# EAGLE board Sch (EAGLE 6.4)
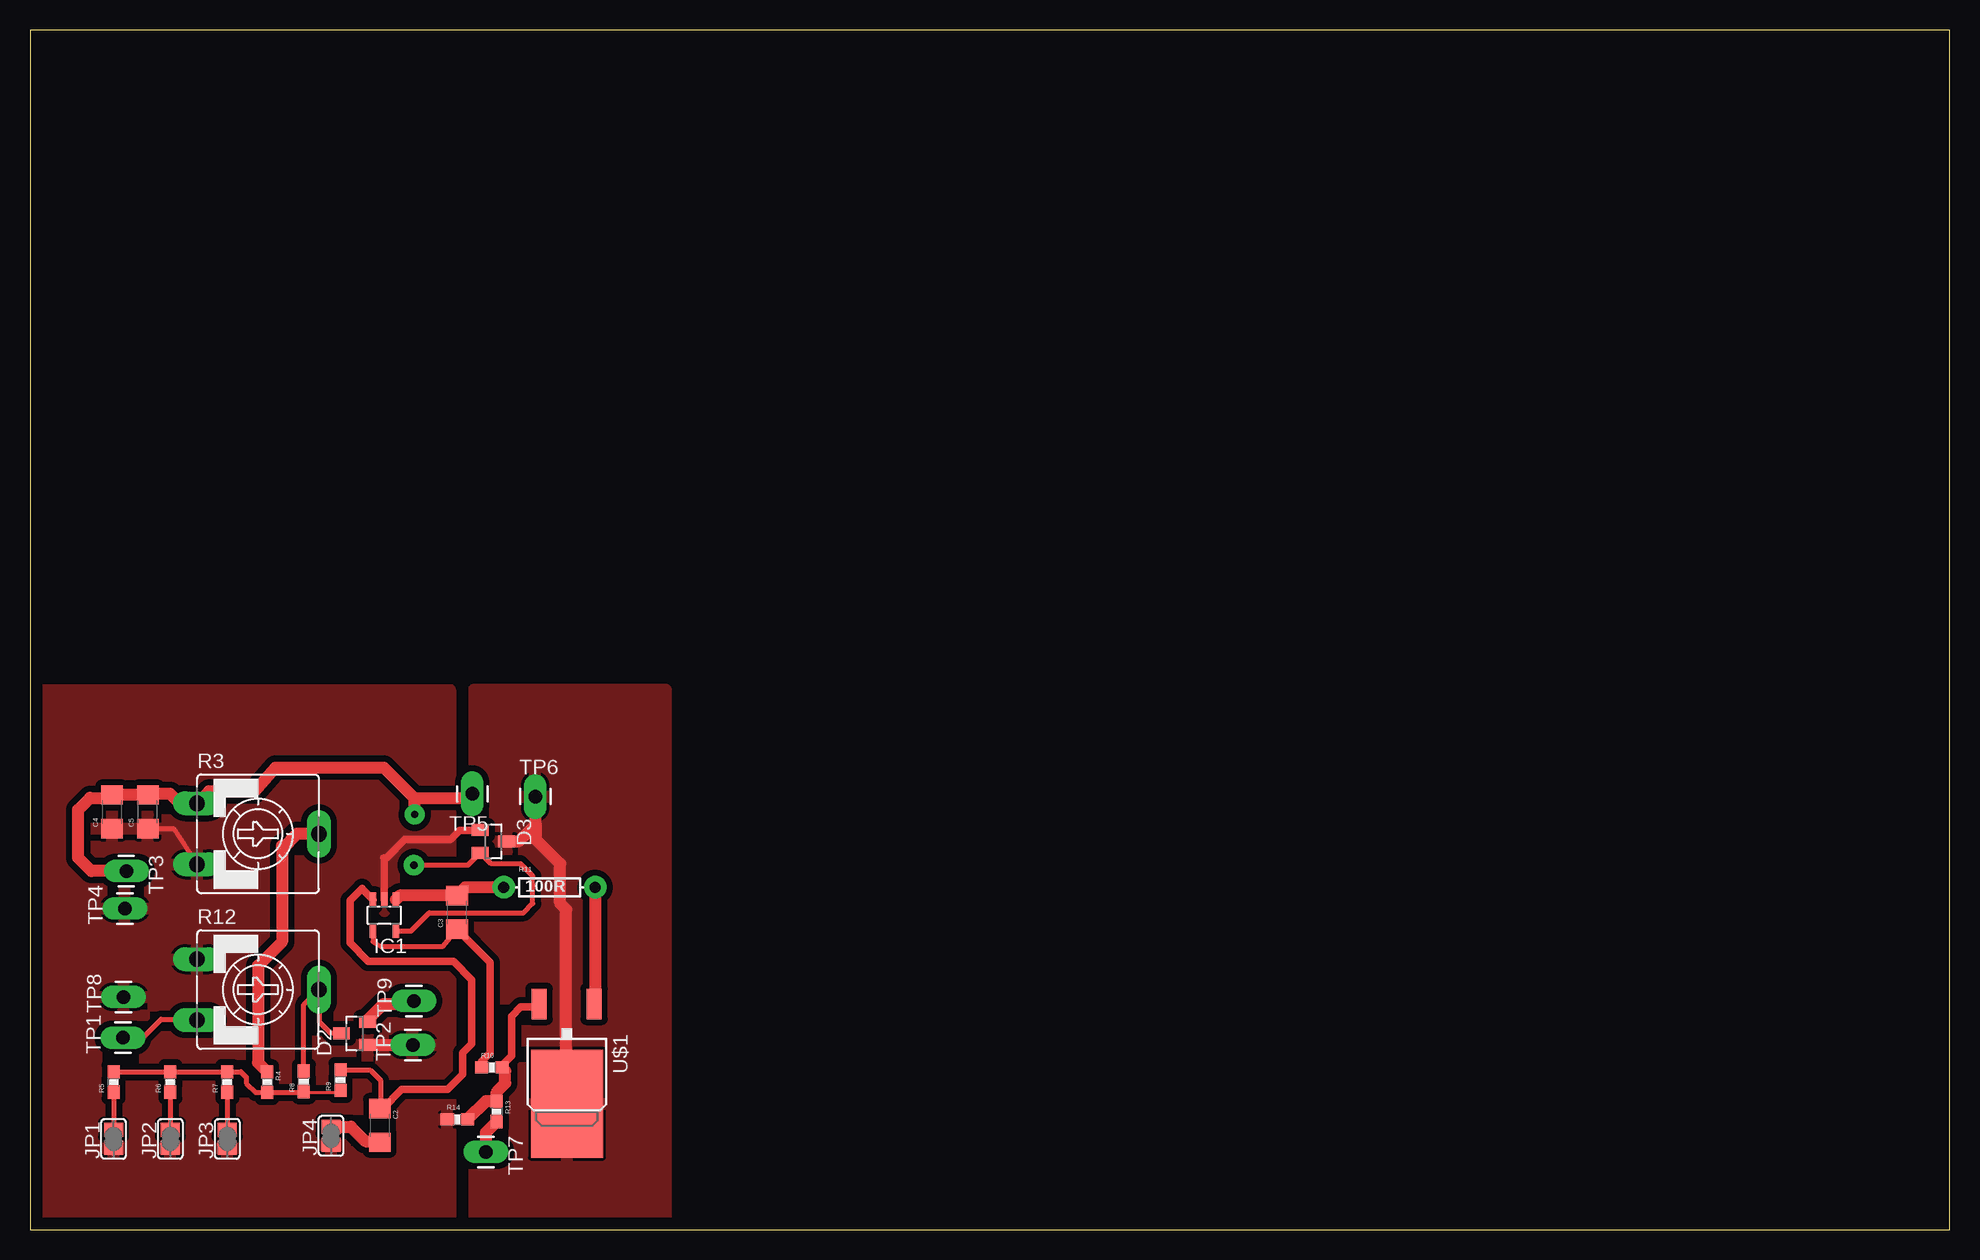
[diagram p0: board, top side]
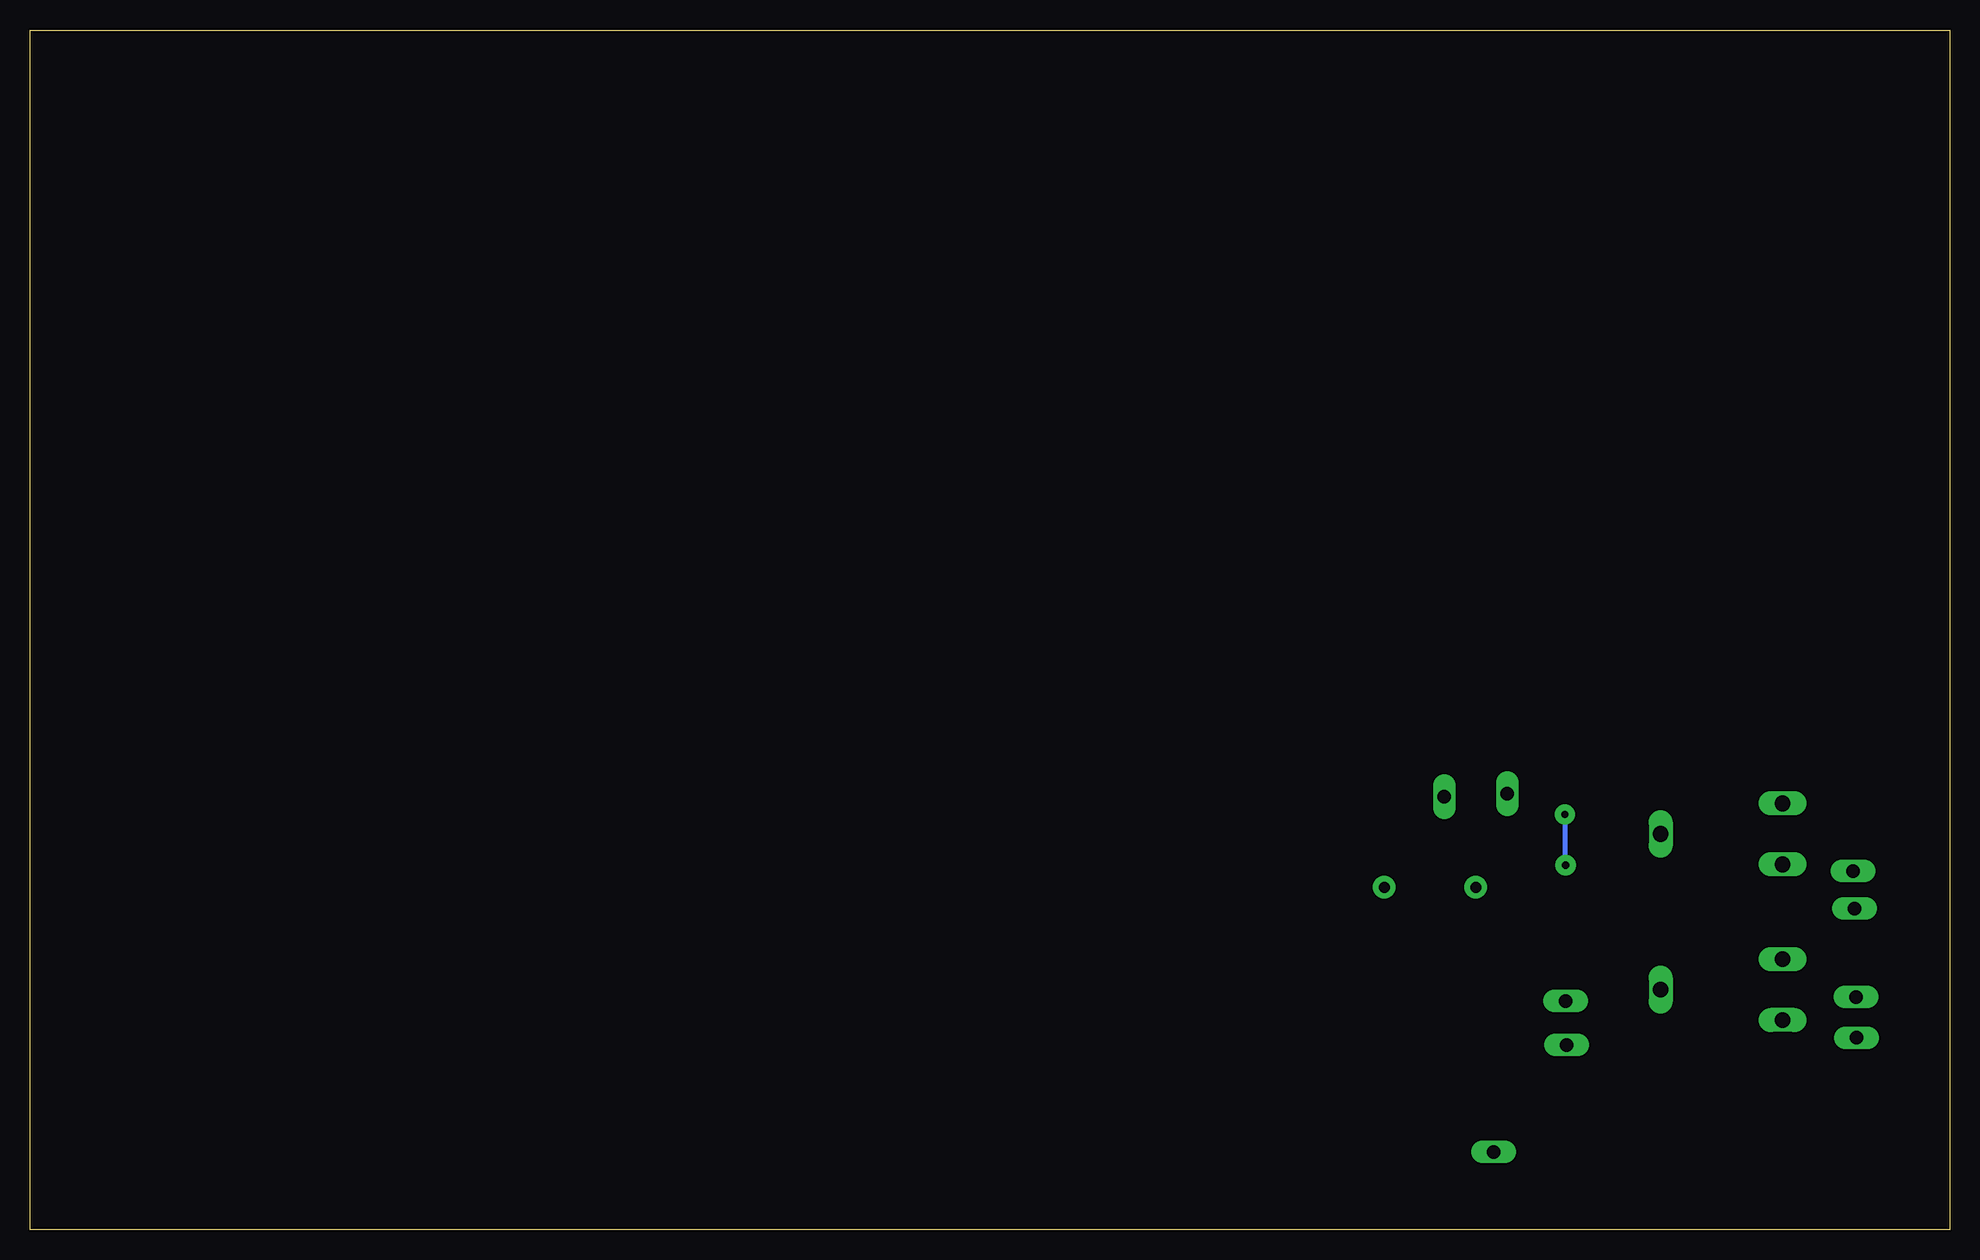
[diagram p1: board, bottom side, seen from below]

Size 160 x 100 mm. Coordinates in mm from the lower left corner, seen from the top.
Outline: 0,0 160,0 160,100 0,100 0,0
Copper layers (1*16): Top 0.035mm / dielectric 1.5mm / Bottom 0.035mm
Design rules "default": minimum track width 10mil, minimum drill 24mil, track to track 8mil, track to pad 8mil, pad to pad 8mil, via to via 8mil, smd to smd 8mil, copper to edge 40mil, drill to drill 8mil, minimum pad ring 10mil, minimum via ring 8mil, stop-mask expansion 4mil, vias tented up to drill 0mil, thermal gap 10mil
Net classes: 0 default: clearance 0.508 mm

## Footprints (pad centres in the part's own frame; a part is rotated, then mirrored left to right if it is on the bottom)
1206 = smd 1.6 x 1.8: 1 -1.4,0; 2 1.4,0
SOT23 = smd 1 x 1.4: 1 -0.95,-1.1; 2 0.95,-1.1; 3 0,1.1
SOT23-5 = smd 0.55 x 1.2: 1 -0.95,-1.3; 2 0,-1.3; 3 0.95,-1.3; 4 0.95,1.3; 5 -0.95,1.3
SJ = smd 1.168 x 1.6: 1 -0.762,0; 2 0.762,0
CA9V = drill 1.321 long: A -2.54,-5.08; E 2.54,-5.08; S 0,5.08
0603-RES = smd 1.1 x 1: 1 -0.85,0; 2 0.85,0
AXIAL-0.3 = drill 0.9 pad 1.88: P$1 -3.81,0; P$2 3.81,0
1X01_LONGPAD = drill 1.118 pad 1.88 long: 1 0,0
TO252AA-LARGE = smd 1.27 x 2.54: P$1 -2.261,-6.325; P$2 2.311,-6.325 | smd 6 x 9: P$3 0,2

## Placement (x,y rotation side)
C2  470p  [1206]  29.16,8.68 270 top
C3  470p  [1206]  35.6,26.44 90 top
C4  100n  [1206]  6.84,34.82 90 top
C5  47u  [1206]  9.82,34.82 90 top
D2  BAV199  [SOT23]  27.05,16.35 90 top
D3  BAV99  [SOT23]  38.63,32.36 270 top
IC1  LMH6645MF  [SOT23-5]  29.53,26.19 180 top
JP1  [SJ]  6.97,7.56 90 top
JP2  [SJ]  11.7,7.56 90 top
JP3  [SJ]  16.44,7.56 90 top
JP4  [SJ]  25.09,7.81 90 top
R3  10K  [CA9V]  19,32.98 270 top
R4  [0603-RES]  19.77,12.29 270 top
R5  2K7  [0603-RES]  6.97,12.3 90 top
R6  1K2  [0603-RES]  11.7,12.3 90 top
R7  470R  [0603-RES]  16.44,12.3 90 top
R8  10K  [0603-RES]  22.83,12.35 90 top
R9  10K  [0603-RES]  25.88,12.46 90 top
R10  1K  [0603-RES]  38.49,13.51 0 top
R11  100R  [AXIAL-0.3]  43.3,28.53 0 top
R12  10K  [CA9V]  19,20 270 top
R13  1K  [0603-RES]  38.91,9.85 270 top
R14  1R  [0603-RES]  35.64,9.18 0 top
TP1  Analogue / TTL Drive  [1X01_LONGPAD]  7.75,15.98 90 top
TP2  GND  [1X01_LONGPAD]  31.91,15.38 90 top
TP3  VCC  [1X01_LONGPAD]  8.03,29.88 270 top
TP4  GND  [1X01_LONGPAD]  7.91,26.76 90 top
TP5  LDA  [1X01_LONGPAD]  36.87,36.32 180 top
TP6  LDC  [1X01_LONGPAD]  42.12,36.1 0 top
TP7  MON  [1X01_LONGPAD]  38,6.47 270 top
TP8  GND  [1X01_LONGPAD]  7.8,19.39 90 top
TP9  +5v  [1X01_LONGPAD]  32,19.05 90 top
U$1  IRLR3105  [TO252AA-LARGE]  44.75,12.48 180 top

## Library data of the parts
C2-C5 R4-R11 R13 R14 = SparkFun-Passives
D2 D3 = diode
IC1 = analog-devices; MF: ALTERA CORPORATION; MPN: AD8067ARTZ-REEL7; OC_FARNELL: 1464848; OC_NEWARK: 59K6326
JP1-JP4 = jumper
R3 R12 = pot
TP1-TP9 = SparkFun-Connectors
U$1 = transistor-power

## Nets
+5V: D2.2 TP9.1
GNDA: C4.1 C5.1 D2.1 D3.1 IC1.2 JP1.1 JP2.1 JP3.1 JP4.1 R3.E R12.A R14.1 TP2.1 TP4.1 TP8.1
N$1: R12.E TP1.1
N$2: D2.3 R8.2 R12.S
N$3: R3.S R4.1
N$4: R4.2 R5.2 R6.2 R7.2 R8.1 R9.1
N$5: JP1.2 R5.1
N$6: JP2.2 R6.1
N$7: JP3.2 R7.1
N$8: C2.2 JP4.2
N$9: C2.1 IC1.3 R9.2
N$10: C3.1 IC1.4 R10.1
N$11: C3.2 IC1.1 R11.P$1
N$12: R11.P$2 U$1.P$1
N$14: D3.3 TP6.1 U$1.P$3
N$15: R10.2 R13.1 R14.2 U$1.P$2
N$17: R13.2 TP7.1
VCC: C4.2 C5.2 D3.2 IC1.5 R3.A TP3.1 TP5.1

## Tracks (layer width: path | path; a pad name or v marks a point on that pad's centre or on a via)
+5V
  Top 0.406: 28.18,17.27 D2.2
  Top 1.016: 28.18,17.27 28.18,17.51 29.46,18.8 31.75,18.8 TP9.1
GNDA
  Top 0.406: 6.9,6.35 JP1.1 | C5.1 11.96,33.42 R3.E | 16.7,6.54 JP3.1
  Top 0.61: IC1.2 29.53,30.92 29.46,30.99 29.72,30.99 31.24,32.51 35.05,32.51 35.81,33.27 37.5,33.27 D3.1
  Top 1.016: D2.1 31.89,15.4 TP2.1
  pour Top: 0,0 0,45 35,45 35,0
N$1
  Top 0.406: TP1.1 9.38,15.98 10.92,17.53 13.85,17.53 R12.E
N$2
  Top 0.406: R8.2 22.83,18.75 R12.S 24.13,19.95 24.13,17.27 25.06,16.35 D2.3
N$3
  Top 1.016: 21,32 21,31.75 | 21,31.75 21,24 19,22 19,13.9 R4.1 | R3.S 22.23,32.98 21,31.75
N$4
  Top 0.254: R9.1 25.4,11.43 22.86,11.43 R8.1
  Top 0.406: 7.12,13.3 R5.2 R6.2 R7.2 17.58,13.15 18.03,12.7 18.03,12.19 18.8,11.43 R4.2 22.77,11.44 R8.1
N$5
  Top 0.406: R5.1 JP1.2
N$6
  Top 0.406: R6.1 JP2.2
N$7
  Top 0.406: R7.1 JP3.2
N$8
  Top 1.016: JP4.2 26.73,8.57 27.94,7.37 29.07,7.37 C2.2
N$9
  Top 0.406: R9.2 28.35,13.31 29.21,12.45 29.21,10.13 C2.1
  Top 0.61: C2.1 29.39,10.08 30.99,11.68 34.8,11.68 36.07,12.95 36.07,14.73 36.83,15.49 36.83,20.83 35.31,22.35 28.19,22.35 26.67,23.88 26.67,27.43 27.69,28.45 27.69,28.39 IC1.3
N$10
  Top 0.406: IC1.4 28.58,23.99 29.21,23.62 34.44,23.62 C3.1
  Top 0.61: R10.1 37.64,14.02 38.35,14.73 38.35,22.29 C3.1
N$11
  Top 1.016: R11.P$1 36.3,28.53 C3.2 30.83,27.84 IC1.1
N$12
  Top 1.016: R11.P$2 47.11,18.9 U$1.P$1
N$14
  Top 0.406: 44.7,10.53 U$1.P$3
  Top 1.016: D3.3 40.74,32.36 42.16,33.78 | 42.16,33.78 42.16,36.05 TP6.1 | 42.16,33.78 42.16,32.51 44.2,30.48 44.2,27.18 44.7,26.67 44.7,10.53
  pour Top: 37,0 53,0 53,45 37,45
N$15
  Top 0.61: R10.2 39.34,13.69 40.13,14.48 40.13,17.78 40.89,18.54 42.17,18.54 U$1.P$2
  Top 1.016: R10.2 39.62,13.22 39.62,12.19 38.91,11.47 R13.1 38,10.7 R14.2
N$17
  Top 1.016: TP7.1 38,8.09 R13.2
VCC  (via drill 0.6 pad 1.68)
  Top 0.406: 9.14,36.54 C5.2 | IC1.5 31.75,24.89 33.27,26.42 41.15,26.42 41.91,27.18 41.91,29.46 40.89,30.48 38.46,30.48 D3.2 | 37.85,31.09 D3.2 | 36.77,36.22 TP5.1 | v32.05,34.59 31.95,34.59 | v32,30.38 36.5,30.38 D3.2
  Top 1.016: TP3.1 5.12,29.88 4,31 4,35 5,36 6.62,36 C4.2 C5.2 9.92,36.32 11.68,36.32 12.48,35.52 R3.A 14.94,36.54 18.75,36.54 20.46,38.51 29.49,38.51 32,36 | 32,36 32,34.65 v32.05,34.59 | 32,36 36.55,36 TP5.1
  Bottom 0.406: v32.05,34.59 32.05,30.43 v32,30.38